# Altium PCB Brelok(CR2430).PcbDoc
Units mm, origin at the board's own origin, x right, y up, seen from the top; angles counter-clockwise.
Board outline 33 x 52 mm, 2 copper layers (Top Layer, Bottom Layer), stack 1.571 mm thick; 11 components, 15 nets, 65 pads, 15 vias.
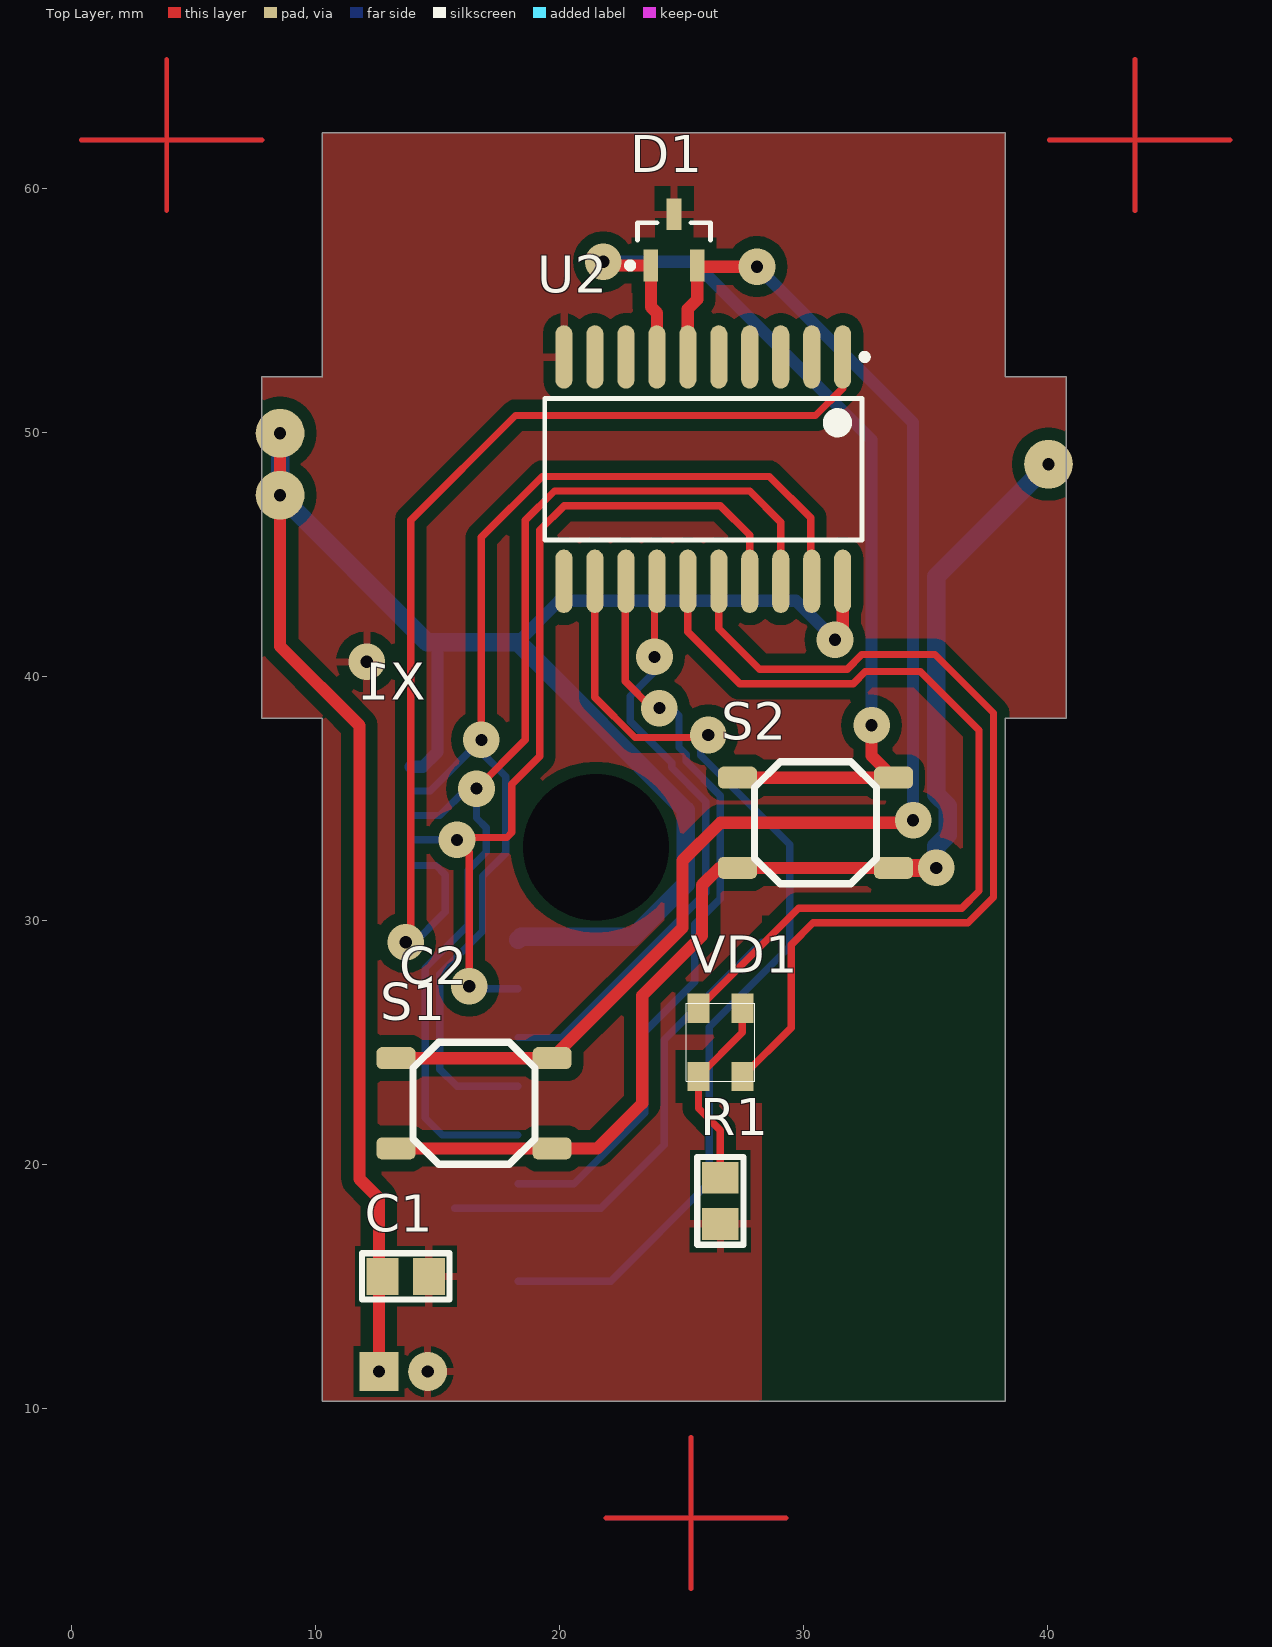
[diagram p0: Top Layer view]
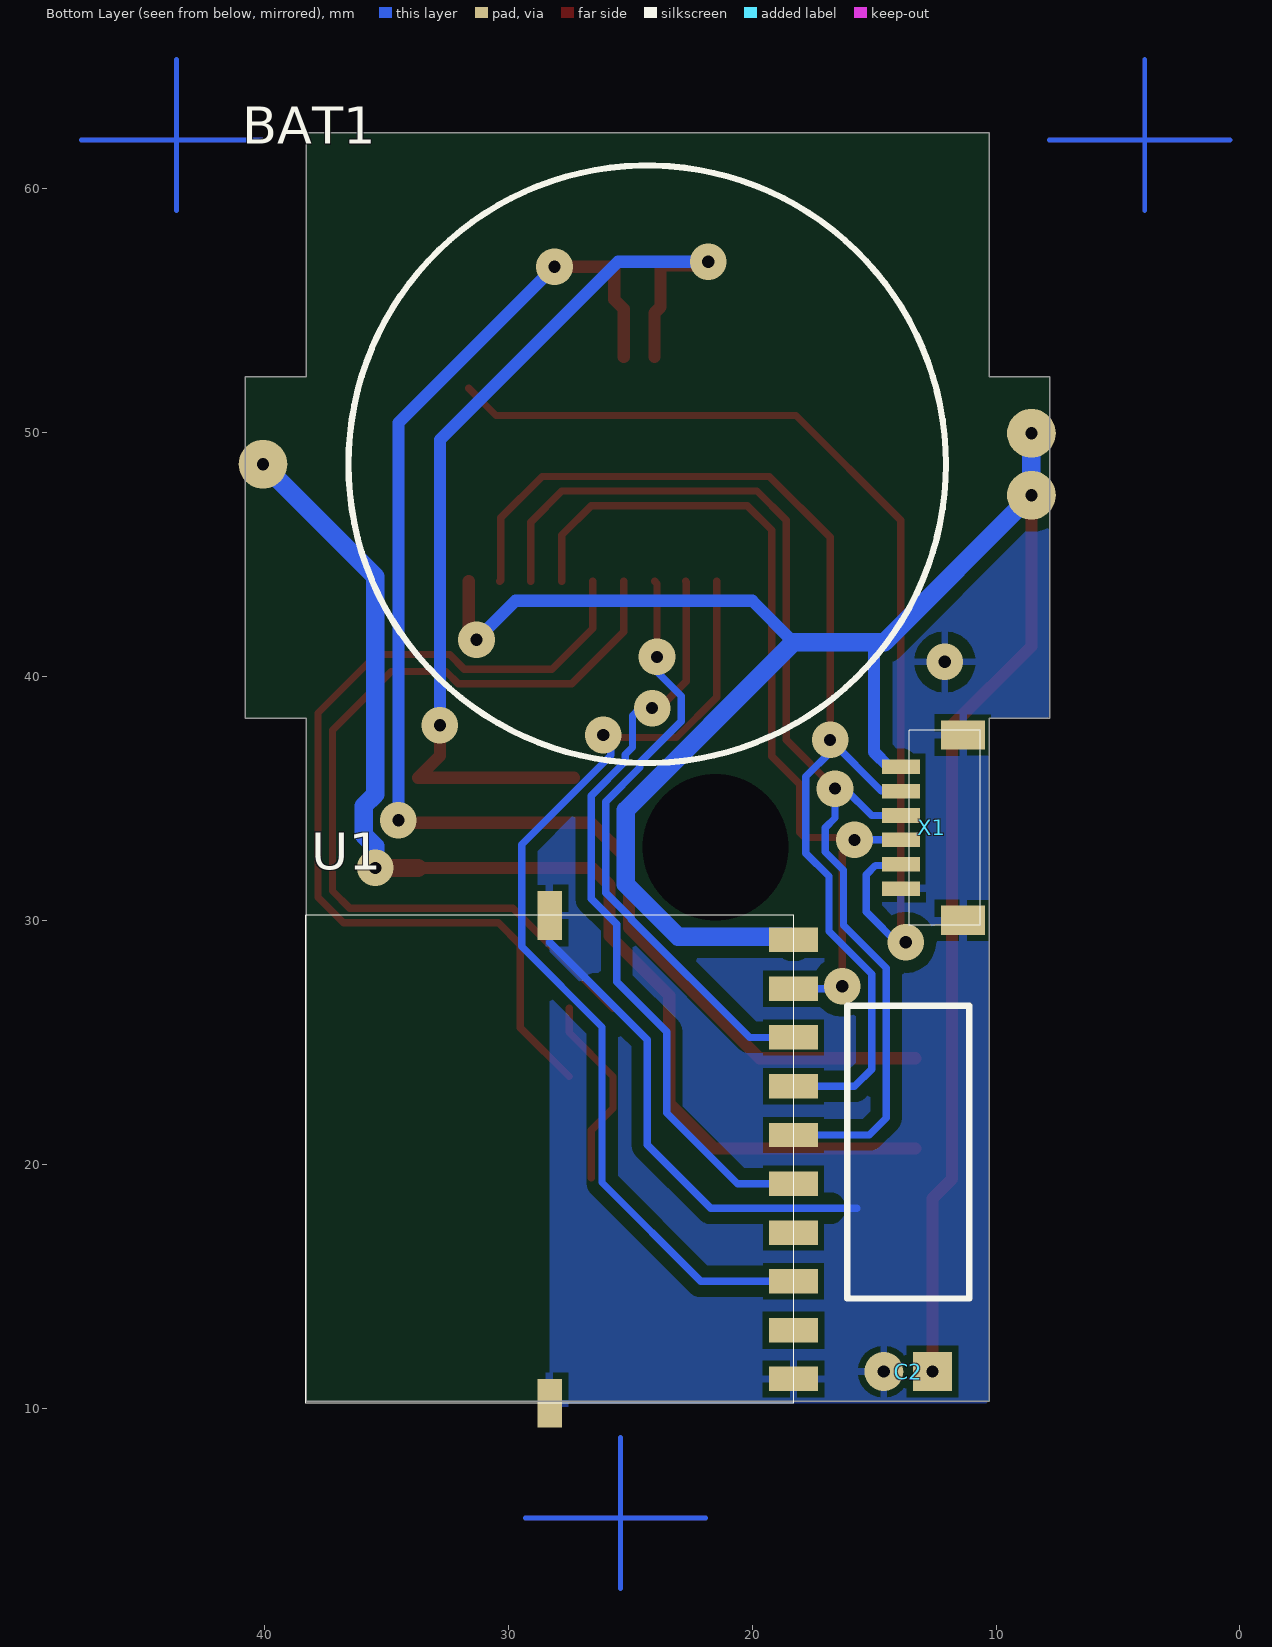
[diagram p1: Bottom Layer view, seen from below]

## Layer stack, top to bottom
Top Layer: signal copper 0.0356
Dielectric: core 1.5, FR-4, Dk 4.8
Bottom Layer: signal copper 0.0356

## Board outline
10.287,10.287 38.287,10.287 38.287,38.287 40.787,38.287 40.787,52.287 38.287,52.287 38.287,62.287 10.287,62.287 10.287,52.287 7.787,52.287 7.787,38.287 10.287,38.287

## Design rules (kind name [scope] priority, off if disabled: settings)
Clearance Clearance_R [IsPad  And InComponent('C2','X1','U1') vs InNet('GND')] p1: gap=0.254
Clearance Clearance_1 [InNet('GND')] p2: gap=0.5
Clearance [All] p3: gap=0.3
ComponentClearance [All] p1: gap=0 collisioncheckmode=3 verticalgap=0 showdistances=FALSE
HoleSize [All] p1: absolutevalues=TRUE maxlimit=8 minlimit=0.025 maxpercent=80.000 minpercent=20.000
PlaneConnect [All] p1: planeconnectstyle=Relief reliefexpansion=0.5 reliefentries=4 reliefconductorwidth=0.3 reliefairgap=0.3
PolygonConnect [All] p1: connectstyle=Relief reliefconductorwidth=0.3 reliefentries=4 polygonreliefangle="90 Angle"
RoutingCorners [All] p1: cornerstyle=45-Degree minsetback=0.3 maxsetback=3
RoutingVias [All] p1: holewidth=0.6 width=1.6 viastyle="Through Hole" minholewidth=0.5 minwidth=1.5 maxholewidth=0.7 maxwidth=2
SilkscreenOverComponentPads [All] p1: minsilkscreentomaskgap=0
SolderMaskExpansion [All] p1: expansion=0.102
Width [All] p1: maxlimit=1 minlimit=0.2 preferedwidth=0.5
23 further rules are at their usual default settings.

## Components (designator, comment, footprint, x,y, rotation, side; value= is the part's Value field where it differs from the comment)
BAT1 "BATTERY" HU2430 24.3,48.7 r180 bottom
C1 "KONDENS_SMD" C0805 13.7,15.4 r0 top
C2 "100uFx16V" "CAP 5mm Horizontal" 13.6,20.5 r270 bottom
D1 "BAT54A" SOT23_N 24.7,57.9 r90 top
R1 "RES" C0805 26.6,18.5 r90 top
S1 "SWT-41" SWT-41 16.5,22.5 r180 top locked
S2 "SWT-41" SWT-41 30.5,34 r180 top locked
U1 "TR24A" TR24A 18.3,29.2 r180 bottom
U2 "ATtiny2313A-SU" 20S_M 25.9,48.5 r270 top
VD1 "GNL-1210UEUGC-INVERT" GNL-1210UEUGC-INVERT 25.7,23.6 r90 top
X1 "SH06V" SH06V 13.9,36.3 r90 bottom

## Footprints (in the part's own frame and the unit in brackets; to place one, negate y for a bottom-side part, rotate by r counter-clockwise, add the part's x,y. Pads: shape width x height; smd on the part's side, far side on the other; paste and mask are expansions set on the pad)
20S_M [mm] "SOIC, 20-Leads, Body 12.8x7.5mm, Pitch 1.27mm, IPC Low Density"
  oval 2.6x0.7 smd: 1(-4.6,5.715) 2(-4.6,4.445) 3(-4.6,3.175) 4(-4.6,1.905) 5(-4.6,0.635) 6(-4.6,-0.635) 7(-4.6,-1.905) 8(-4.6,-3.175) 9(-4.6,-4.445) 10(-4.6,-5.715) 11(4.6,-5.715) 12(4.6,-4.445) 13(4.6,-3.175) 14(4.6,-1.905) 15(4.6,-0.635) 16(4.6,0.635) 17(4.6,1.905) 18(4.6,3.175) 19(4.6,4.445) 20(4.6,5.715)
  silkscreen extent -4.72,-6.5 2.9,6.74, body extent -3.75,-6.5 3.75,6.5, height 2.65
C0805 [mm]
  rect 1.3x1.5 smd: 1(-0.95,0) 2(0.95,0)
  silkscreen extent -1.8,-0.95 1.8,0.95
"CAP 5mm Horizontal" [mm]
  rect 1.6x1.6 hole 0.5: 1(9,1)
  round 1.6 hole 0.5: 2(9,-1)
  silkscreen extent -6,-2.5 6,2.5
GNL-1210UEUGC-INVERT [mm]
  rect 1.2x0.9 smd: 1(0,0) 2(2.8,0) 3(0,-1.8) 4(2.8,-1.8)
  silkscreen extent -0.2,-2.3 3,0.5
HU2430 [mm]
  round 2 hole 0.5: +(15.75,-1.27) +(15.75,1.27) -(-15.75,0)
  silkscreen extent -12.25,-12.25 12.25,12.25, body extent -11.91,-11.98 12,11.98, height 5
SH06V [mm]
  rect 0.6x1.55 smd: 1(0,0) 2(-1,0) 3(-2,0) 4(-3,0) 5(-4,0) 6(-5,0)
  rect 1.2x1.8 smd: 7(-6.3,-2.55) 8(1.3,-2.55)
  silkscreen extent -6.5,-3.25 1.5,-0.35
SOT23_N [mm] "SOT23, 3-Leads, Body 2.9x1.3mm, Pitch 0.95mm, Lead Span 2.3mm, IPC Medium Density"
  rect 1.3x0.6 smd: 1(-1.05,0.95) 2(-1.05,-0.95) 3(1.05,0)
  silkscreen extent -1.17,-1.5 0.7,1.92, body extent -0.7,-1.5 0.7,1.5, height 1.1
SWT-41 [mm]
  rrect50% 1.6x0.9 smd: 1(-3.2,1.85) 2(3.2,1.85) 3(-3.2,-1.85) 4(3.2,-1.85)
  silkscreen extent -2.5,-2.5 2.5,2.5
TR24A [mm]
  rect 2x1 smd: 1(0,0) 2(0,-2) 3(0,-4) 4(0,-6) 5(0,-8) 6(0,-10) 7(0,-12) 8(0,-14) 9(0,-16) 10(0,-18)
  rect 1x2 smd: 11(-10,-19) 12(-10,1)
  silkscreen extent -20,-19 0,1

## Part data
C2: library part KONDENS-E6.5MM, "KONDENS-E6.5MM"
D1: "Schottky Barrier Double Diode"
R1: "Resistor"
U2: "8-bit AVR Microcontroller, 1.8-5.5V, 2KB Flash, 128 Bytes EEPROM, 128 Bytes SRAM, 20-pin SOIC, Industrial Grade (-40°C to 85°C), Pb-Free"

## Free pads (board coordinates)
  round 0 hole 6 unplated: 0(21.5,33)

## Via types
v1: diameter 1.5, hole 0.5, Top Layer to Bottom Layer, 15 vias

## Nets (pads, with @x,y where several pads share a name; then routed paths per layer and width w, separated by ;. In a path a pad name is that pad's centre, name@x,y a point inside that pad or via, vN(x,y) a via of type N, cw(c..) or ccw(c..) an arc to the next point about the centre after c; other vN are vias at no path point)
GND: C1.2 C2.2 D1.3 R1.1 U1.10 U1.11 U1.12 U2.10 X1.6 X1.7 X1.8 | length 19.6
  Bottom Layer w0.3: 15.7,18.2 19.719,18.2 21.7,18.2 24.3,20.8 24.3,25.1 28.3,29.1
  other v1: 12.1,40.6
GREEN: U2.16 VD1.3 | length 38
  Top Layer w0.3: U2.16 26.535,41.965 28.2,40.3 31.797,40.3 32.397,40.9 35.4,40.9 37.8,38.5 37.8,30.951 36.749,29.9 30.4,29.9 29.5,29 29.5,25.6 VD1.3
NetBAT1_-: BAT1.- S1.1 S1.2 S2.1 S2.2 | length 49.6
  Top Layer w0.5: S1.2 S1.1 21.55,20.65 23.4,22.5 23.4,26.919 25.85,29.369 25.85,31.45 26.55,32.15 S2.2 S2.1
  Top Layer w0.75: S2.1 v1(35.45,32.15)
  Bottom Layer w0.75: v1(35.45,32.15) 35.45,33.035 35.925,33.51 35.925,34.69 35.45,35.165 35.45,44.1 BAT1.-
NetD1_1: D1.1 S2.3 S2.4 U2.7 | length 40.5
  Top Layer w0.5: v1(21.8,57) 21.95,56.85 D1.1 23.75,55.15 24,54.9 24,53.105 U2.7 ; S2.4 S2.3 32.8,36.75 v1(32.8,38)
  Bottom Layer w0.5: v1(21.8,57) 25.5,57 32.8,49.7 v1(32.8,38)
NetD1_2: D1.2 S1.3 S1.4 U2.6 | length 58.6
  Top Layer w0.5: S1.4 S1.3 25.05,29.7 25.05,32.45 26.6,34 34.5,34 v1(34.5,34.1) ; U2.6 25.265,55.065 25.65,55.45 D1.2 25.7,56.8 v1(28.1,56.8)
  Bottom Layer w0.5: v1(28.1,56.8) 34.5,50.4 v1(34.5,34.1)
NetR1_2: R1.2 VD1.1 VD1.4 | length 8.1
  Top Layer w0.3: R1.2 26.6,21.4 25.7,22.3 VD1.1 27.5,25.4 VD1.4
PKT_F: U1.8 U2.12 | length 41.6
  Top Layer w0.3: U2.12 21.455,39.145 23.1,37.5 26,37.5 v1(26.1,37.6)
  Bottom Layer w0.3: U1.8 22.1,15.2 26.15,19.25 26.15,25.631 29.45,28.931 29.45,33.111 25.8,36.761 25.8,37.9 v1(26.1,37.6)
RED: U2.15 VD1.2 | length 36.2
  Top Layer w0.3: U2.15 25.265,41.835 27.4,39.7 32.046,39.7 32.546,40.2 34.8,40.2 37.2,37.8 37.2,31.2 36.5,30.5 29.8,30.5 VD1.2
RESET: U2.1 X1.5 | length 43.2
  Top Layer w0.3: v1(13.7,29.1) 13.9,28.9 13.9,46.4 18.2,50.7 30.5,50.7 U2.1@31.615,51.815
  Bottom Layer w0.3: v1(13.7,29.1) 13.9,28.9 13.9,28.925 15.325,30.35 15.325,31.869 14.944,32.25 13.95,32.25 X1.5
RESET_TR: U1.3 U2.14 | length 24.7
  Top Layer w0.3: v1(23.9,40.8) 23.9,43.805 U2.14
  Bottom Layer w0.3: U1.3 20.1,25.2 24.95,30.05 24.95,30.086 26,31.136 26,34.864 24.6,36.264 24.6,36.467 22.9,38.167 22.9,39.197 23.9,40.197 v1(23.9,40.8)
SPI_MISO/DO: U1.5 U2.18 X1.3 | length 47.7
  Top Layer w0.3: v1(16.6,35.4) 18.6,37.4 18.6,46.4 19.8,47.6 27.8,47.6 29.075,46.325 U2.18
  Bottom Layer w0.3: X1.3 15.1,34.3 16.2,35.4 v1(16.6,35.4) 16.6,34.197 17,33.797 17,32.803 16.25,32.053 16.25,29.796 14.5,28.046 14.5,21.9 15.2,21.2 U1.5
SPI_MOSI/DI: U1.2 U2.17 X1.4 | length 36.8
  Top Layer w0.3: v1(16.3,27.3) 16.3,32.8 v1(15.8,33.3) 15.9,33.4 17.85,33.4 18.05,33.6 18.05,35.579 19.2,36.729 19.2,46 20.2,47 26.6,47 27.805,45.795 U2.17
  Bottom Layer w0.3: X1.4 v1(15.8,33.3) ; v1(16.3,27.3) 16.4,27.2 U1.2
SPI_SCK: U1.4 U2.19 X1.2 | length 48.5
  Top Layer w0.3: v1(16.8,37.4) 16.8,45.7 19.3,48.2 28.6,48.2 30.3,46.5 30.3,43.945 U2.19
  Bottom Layer w0.3: X1.2 14.7,35.3 v1(16.8,37.4) 16.8,36.897 17.8,35.897 17.8,32.754 16.85,31.804 16.85,29.547 15.1,27.797 15.1,23.9 15.8,23.2 U1.4
SPI_SS: U1.6 U2.13 | length 31.6
  Top Layer w0.3: U2.13 22.7,43.875 22.7,39.8 23.8,38.7 v1(24.1,38.7)
  Bottom Layer w0.3: U1.6 20.6,19.2 23.5,22.1 23.5,25.431 25.55,27.481 25.55,29.837 26.6,30.887 26.6,35.112 25.2,36.512 25.2,36.803 24.9,37.103 24.9,38.4 24.6,38.7 v1(24.1,38.7)
VCC: BAT1.+ C1.1 C2.1 U1.1 U2.20 X1.1 | length 98.3
  Top Layer w0.5: BAT1.+@8.55,49.97 8.55,47.43 8.55,41.235 11.8,37.985 11.8,19.4 12.6,18.6 C2.1 ; v1(31.3,41.5) 31.615,41.815 U2.20
  Bottom Layer w0.5: X1.1 14.4,36.3 15,36.9 15,41.4 ; 18.297,41.4 19.997,43.1 29.7,43.1 v1(31.3,41.5)
  Bottom Layer w0.75: BAT1.+@8.55,49.97 8.55,47.43 14.58,41.4 15,41.4 18.297,41.4 25.175,34.522 25.175,31.478 23.022,29.325 18.425,29.325 U1.1
pads on no net: U1.7 U1.9 U2.2 U2.3 U2.4 U2.5 U2.8 U2.9 U2.11
copper on no net: | length 81.6
  Top Layer w0.2: 0.4,62 7.8,62 ; 3.9,59.1 3.9,65.3 ; 21.9,5.5 29.3,5.5 ; 25.4,2.6 25.4,8.8 ; 40.1,62 47.5,62 ; 43.6,59.1 43.6,65.3
  Bottom Layer w0.2: 0.4,62 7.8,62 ; 3.9,59.1 3.9,65.3 ; 21.9,5.5 29.3,5.5 ; 25.4,2.6 25.4,8.8 ; 40.1,62 47.5,62 ; 43.6,59.1 43.6,65.3

## Polygon pours and split planes (outlines as drawn)
GND on Top Layer "Top Layer-No Net" (solid, pour order 6): 10.3,62.3 38.3,62.3 38.3,52.3 40.8,52.3 40.8,38.3 38.3,38.3 38.3,30.2 28.3,30.2 28.3,10.2 28.2,10.3 10.3,10.3 10.3,38.3 7.8,38.3 7.8,52.3 10.3,52.3
GND on Bottom Layer "BOT" (solid, remove dead copper, pour order 8): 10.3,62.3 38.3,62.3 38.3,52.3 40.8,52.3 40.8,38.3 38.3,38.3 38.3,30.2 28.3,30.2 28.3,10.2 10.4,10.2 10.3,10.3 10.3,38.3 7.9,38.3 7.8,38.2 7.8,52.3 10.3,52.3

## Silkscreen, mask and mechanical layers (free items; w line width, h text height)
Top Solder:
  lines w0.2: 0.4,62 7.8,62 ; 3.9,59.1 3.9,65.3 ; 21.9,5.5 29.3,5.5 ; 25.4,2.6 25.4,8.8 ; 40.1,62 47.5,62 ; 43.6,59.1 43.6,65.3
Bottom Solder:
  lines w0.2: 0.4,62 7.8,62 ; 3.9,59.1 3.9,65.3 ; 21.9,5.5 29.3,5.5 ; 25.4,2.6 25.4,8.8 ; 40.1,62 47.5,62 ; 43.6,59.1 43.6,65.3